# EAGLE board phase (EAGLE 9.1.2)
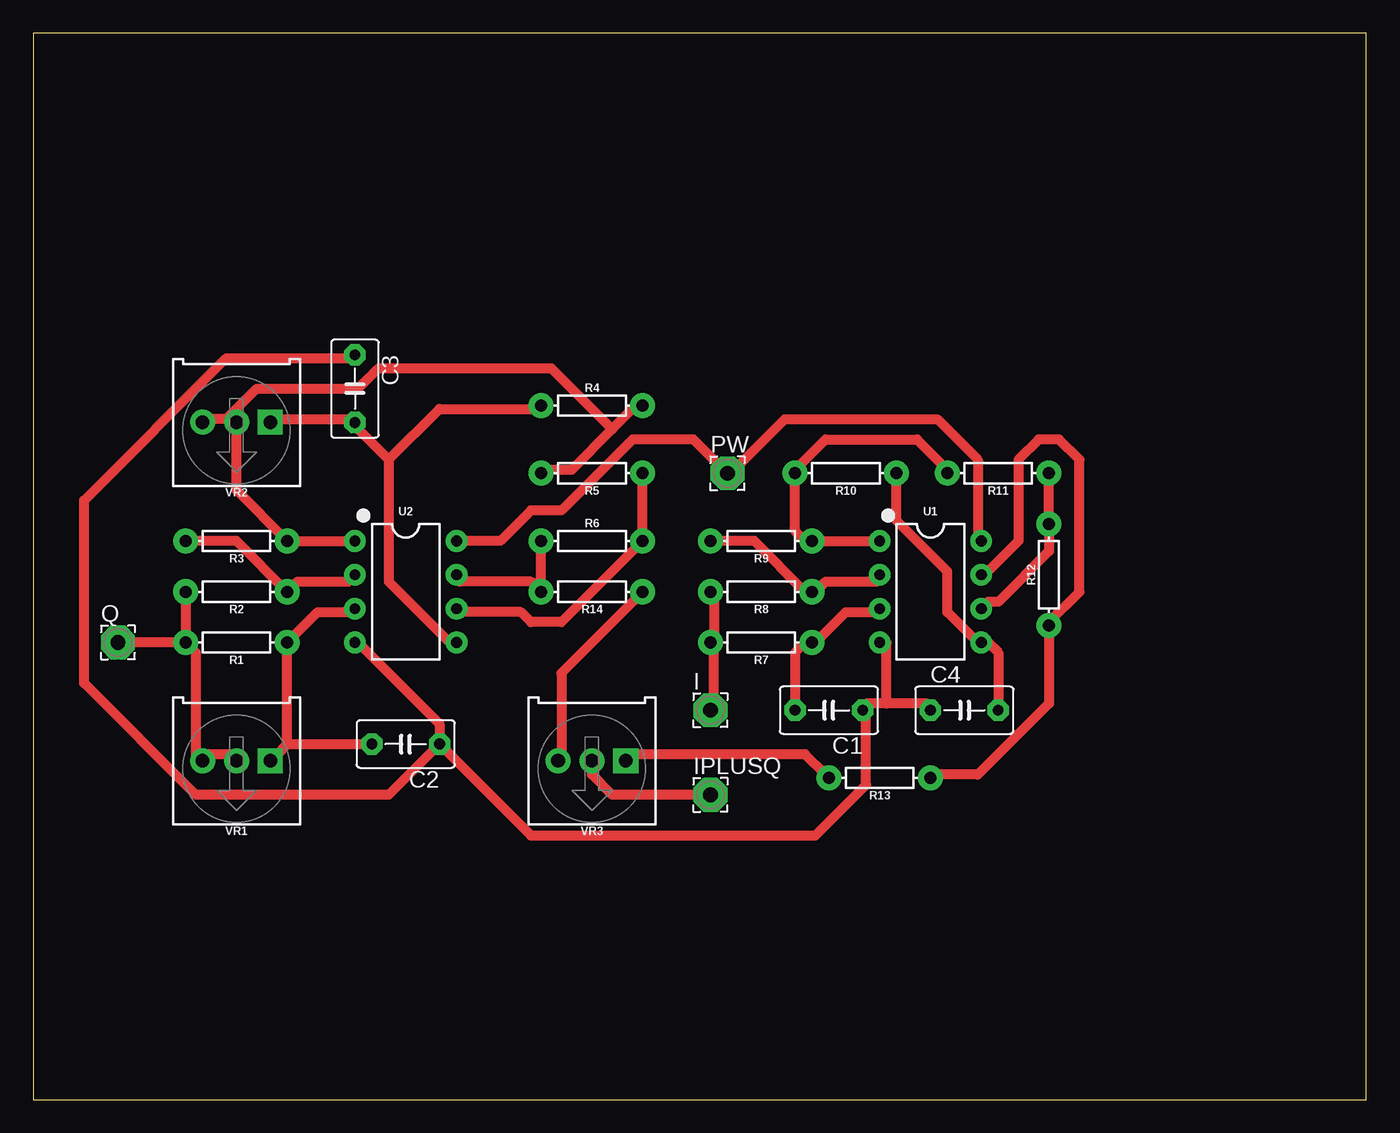
[diagram p0: board, top side]

Size 100 x 80 mm. Coordinates in mm from the lower left corner, seen from the top.
Outline: 0,0 100,0 100,80 0,80 0,0
Copper layers (1*16): Top 0.035mm / dielectric 1.5mm / Bottom 0.035mm
Design rules "default": minimum track width 6mil, minimum drill 0.35mm, track to track 6mil, track to pad 6mil, pad to pad 6mil, via to via 6mil, smd to smd 6mil, copper to edge 40mil, drill to drill 6mil, minimum pad ring 10mil, minimum via ring 8mil, stop-mask expansion 4mil, vias tented up to drill 0mil, thermal gap 10mil
Net classes: 0 default: width 0.762 mm, drill 0.762 mm, clearance 0.762 mm

## Footprints (pad centres in the part's own frame; a part is rotated, then mirrored left to right if it is on the bottom)
C5B3.5 = drill 0.813 pad 1.6 octagon: 1 -2.54,0; 2 2.54,0
2,54/1,1 = drill 1.118 pad 2.54 octagon: 1 0,0
AXIAL-0.3 = drill 0.9 pad 1.88: P$1 -3.81,0; P$2 3.81,0
DIP08 = drill 0.813 pad 1.626: 1 -3.81,-3.81; 2 -1.27,-3.81; 3 1.27,-3.81; 4 3.81,-3.81; 5 3.81,3.81; 6 1.27,3.81; 7 -1.27,3.81; 8 -3.81,3.81
TRIMPOT-PTH-3386U = drill 1.016 pad 1.88 square: 1 -2.54,-0.015 | drill 1.016 pad 1.88: 2 0,-0.015; 3 2.54,-0.015

## Placement (x,y rotation side)
C1  47nF  [C5B3.5]  59.69,29.21 180 top
C2  10nF  [C5B3.5]  27.94,26.67 180 top
C3  .1uF  [C5B3.5]  24.13,53.34 270 top
C4  470nF  [C5B3.5]  69.85,29.21 0 top
I  [2,54/1,1]  50.8,29.21 0 top
IPLUSQ  [2,54/1,1]  50.8,22.86 0 top
PW  [2,54/1,1]  52.07,46.99 0 top
Q  [2,54/1,1]  6.35,34.29 0 top
R1  10k  [AXIAL-0.3]  15.24,34.29 180 top
R2  3.3k  [AXIAL-0.3]  15.24,38.1 180 top
R3  3.3k  [AXIAL-0.3]  15.24,41.91 180 top
R4  7.5k  [AXIAL-0.3]  41.91,52.07 0 top
R5  3.3k  [AXIAL-0.3]  41.91,46.99 180 top
R6  3.3k  [AXIAL-0.3]  41.91,41.91 0 top
R7  5.1k  [AXIAL-0.3]  54.61,34.29 180 top
R8  3.3k  [AXIAL-0.3]  54.61,38.1 180 top
R9  3.3k  [AXIAL-0.3]  54.61,41.91 180 top
R10  4.3k  [AXIAL-0.3]  60.96,46.99 180 top
R11  3.3k  [AXIAL-0.3]  72.39,46.99 180 top
R12  3.3k  [AXIAL-0.3]  76.2,39.37 90 top
R13  1k  [AXIAL-0.3]  63.5,24.13 180 top
R14  1k  [AXIAL-0.3]  41.91,38.1 180 top
U1  LM358  [DIP08]  67.31,38.1 270 top
U2  LM358  [DIP08]  27.94,38.1 270 top
VR1  50k  [TRIMPOT-PTH-3386U]  15.24,25.4 180 top
VR2  50k  [TRIMPOT-PTH-3386U]  15.24,50.8 180 top
VR3  500  [TRIMPOT-PTH-3386U]  41.91,25.4 180 top

## Library data of the parts
C1-C4 = capacitor-wima
I IPLUSQ PW Q = wirepad
R1-R14 = SparkFun-Resistors; PROD_ID: RES-12182
U1 U2 = SparkFun-IC-Amplifiers; PROD_ID: IC-09172
VR1-VR3 = SparkFun-Resistors; PROD_ID: RES-09730; SF_SKU: COM-09806

## Nets
GND: C1.1 C2.1 C3.1 C4.1 U1.4 U2.4
N$1: C2.2 R1.P$1 U2.3 VR1.1
N$2: R2.P$1 R3.P$2 U2.2
N$3: R3.P$1 R4.P$2 R5.P$2 U2.1 VR2.2 VR2.3
N$4: Q.1 R1.P$2 R2.P$2 VR1.2 VR1.3
N$5: C3.2 R4.P$1 U2.5 VR2.1
N$6: R5.P$1 R6.P$2 U2.6
N$7: R8.P$1 R9.P$2 U1.2
N$8: R6.P$1 R14.P$2 U2.7
N$9: C1.2 R7.P$1 U1.3
N$10: I.1 R7.P$2 R8.P$2
N$11: C4.2 R10.P$1 U1.5
N$12: R9.P$1 R10.P$2 R11.P$2 U1.1
N$13: R11.P$1 R12.P$2 U1.6
N$14: R13.P$2 VR3.1
N$15: R12.P$1 R13.P$1 U1.7
N$16: R14.P$1 VR3.3
N$17: IPLUSQ.1 VR3.2
VCC: PW.1 U1.8 U2.8

## Tracks (layer width: path | path; a pad name or v marks a point on that pad's centre or on a via)
GND
  Top 0.762: 64.01,29.72 67.06,29.72 C4.1 | 64.01,29.72 62.48,29.72 C1.1 62.48,28.96 62.48,23.62 58.67,19.81 37.34,19.81 C2.1 | 64.01,29.72 64.01,34.29 U1.4 | C2.1 30.48,28.19 24.38,34.29 U2.4 | C2.1 26.67,22.86 12.19,22.86 3.81,31.24 3.81,44.96 14.48,55.63 23.62,55.63 C3.1
N$1
  Top 0.762: U2.3 23.62,36.58 21.34,36.58 R1.P$1 19.05,26.67 | 19.05,26.67 25.15,26.67 C2.2 | 19.05,26.67 18.29,25.91 VR1.1
N$2
  Top 0.762: U2.2 23.62,38.86 19.81,38.86 R2.P$1 15.24,41.91 R3.P$2
N$3
  Top 0.762: 43.43,50.29 45.72,52.58 R4.P$2 | 43.43,50.29 40.39,47.24 38.1,47.24 R5.P$2 | 14.48,51.05 15.24,51.05 VR2.2 | 14.48,51.05 12.95,51.05 VR2.3 | U2.1 23.62,41.91 R3.P$1 15.24,45.72 15.24,50.29 VR2.2 | 43.43,50.29 38.86,54.86 25.91,54.86 24.38,53.34 16.76,53.34 14.48,51.05 | 14.48,51.05 VR2.2
N$4
  Top 0.762: VR1.2 15.24,25.91 12.95,25.91 VR1.3 12.19,25.91 12.19,33.53 R1.P$2 | R2.P$2 R1.P$2 | R1.P$2 6.86,34.29 Q.1
N$5
  Top 0.762: VR2.1 18.29,51.05 23.62,51.05 C3.2 24.38,50.29 26.67,48.01 | 26.67,48.01 26.67,38.86 31.24,34.29 U2.5 | 26.67,48.01 30.48,51.82 38.1,51.82 R4.P$1
N$6
  Top 0.762: U2.6 32,36.58 36.58,36.58 37.34,35.81 39.62,35.81 R6.P$2 45.72,46.48 R5.P$1
N$7
  Top 0.762: U1.2 63.25,38.86 59.44,38.86 58.67,38.1 R8.P$1 57.91,38.1 54.1,41.91 51.05,41.91 R9.P$2
N$8
  Top 0.762: U2.7 32,38.86 37.34,38.86 R14.P$2 R6.P$1
N$9
  Top 0.762: C1.2 57.15,29.72 57.15,33.53 57.91,34.29 R7.P$1 58.67,34.29 60.96,36.58 63.25,36.58 U1.3
N$10
  Top 0.762: 51.05,34.29 51.05,38.1 R8.P$2 | 51.05,34.29 R7.P$2 51.05,34.29 | 51.05,34.29 51.05,29.72 I.1
N$11
  Top 0.762: C4.2 72.39,29.72 72.39,33.53 71.63,34.29 U1.5 70.87,34.29 68.58,36.58 68.58,39.62 64.77,43.43 64.77,46.48 R10.P$1
N$12
  Top 0.762: U1.1 63.25,41.91 58.67,41.91 R9.P$1 57.91,41.91 57.15,42.67 57.15,46.48 R10.P$2 57.15,47.24 59.44,49.53 66.29,49.53 68.58,47.24 R11.P$2
N$13
  Top 0.762: U1.6 71.63,37.34 72.39,37.34 76.2,41.15 76.2,42.67 R12.P$2 76.2,43.43 76.2,46.48 R11.P$1
N$14
  Top 0.762: VR3.1 44.96,25.91 57.91,25.91 59.44,24.38 R13.P$2
N$15
  Top 0.762: U1.7 71.63,39.62 73.91,41.91 73.91,48.01 75.44,49.53 76.96,49.53 78.49,48.01 78.49,38.1 76.2,35.81 R12.P$1 76.2,35.05 76.2,29.72 70.87,24.38 67.82,24.38 R13.P$1
N$16
  Top 0.762: R14.P$1 39.62,32 39.62,25.91 VR3.3
N$17
  Top 0.762: VR3.2 41.91,25.15 41.91,24.38 43.43,22.86 50.29,22.86 IPLUSQ.1
VCC
  Top 0.762: U2.8 32,41.91 35.05,41.91 37.34,44.2 39.62,44.2 44.96,49.53 49.53,49.53 51.82,47.24 PW.1 52.58,47.24 56.39,51.05 67.82,51.05 70.87,48.01 70.87,41.91 U1.8